# Altium PCB NucciF.PcbDoc (part 3 of 3)
Units mm, origin at the board's own origin, x right, y up, seen from the top; angles counter-clockwise.
Board outline 88.1 x 36.1 mm, 4 copper layers (Top Layer, inner 1, inner 2, Bottom Layer), stack 1.588 mm thick; 144 components, 118 nets, 519 pads, 140 vias.
Unrouted connection lines stored in the file: 6.
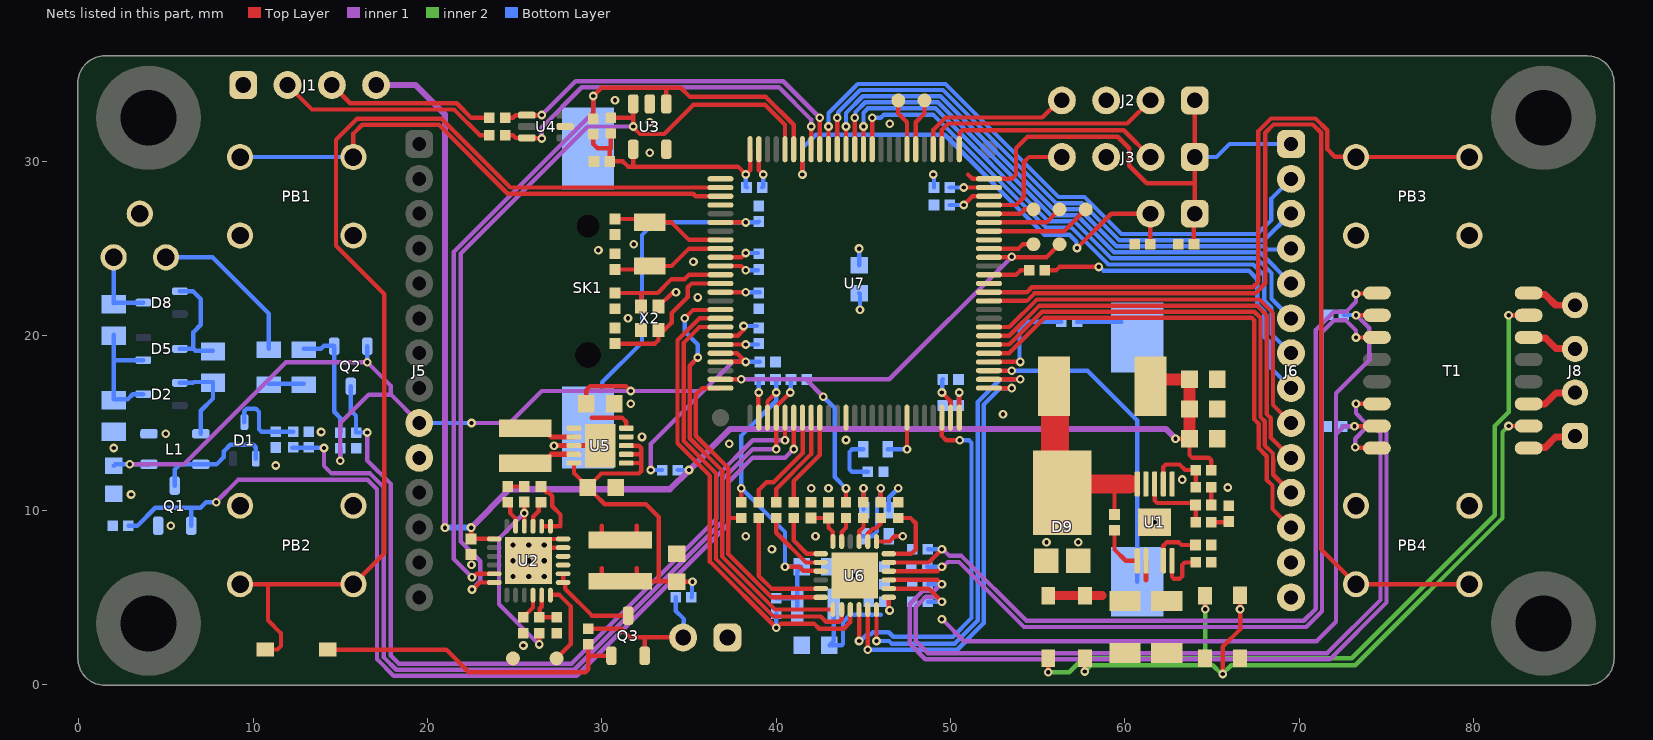
[diagram p4: the nets of this part, all layers, seen from the top]

## Via types
v1: diameter 0.5, hole 0.25, Top Layer to Bottom Layer, tented both sides, 131 vias
v2: diameter 0.6, hole 0.3, Top Layer to Bottom Layer, tented bottom, 9 vias

## Nets (pads, with @x,y where several pads share a name; then routed paths per layer and width w, separated by ;. In a path a pad name is that pad's centre, name@x,y a point inside that pad or via, vN(x,y) a via of type N, cw(c..) or ccw(c..) an arc to the next point about the centre after c; other vN are vias at no path point)
0V: B3.1 C1.1 C2.1 C3.1 C4.1 C5.1 C8.2 C9.1 C10.1 C11.1 C12.1 C13.2 C16.1 C17.1 C18.1 C19.1 C20.2 C21.2 C22.1 C23.2 C24.1 C25.1 C26.1 C27.1 C28.1 C29.2 C30.1 C31.1 C32.1 C33.1 C34.1 C35.2 C36.2 C37.1 C38.1 C39.2 C40.1 C41.1 C42.1 C43.1 C44.1 C45.1 C46.1 C47.1 C48.1 C49.1 D4.2 D7.2 D9.1 D9.2 J1.1 J2.3 J3.3 J5.10 J6.13 J6.14 J7.1 L1.2 LD3.1 PB1.1 PB1.2 PB2.1 PB2.2 PB3.1 PB3.2 PB4.1 PB4.2 Q1.2 R1.1 R4.2 R9.1 R11.1 R12.1 R13.1 R15.2 R18.1 R24.1 R32.2 SK1.2 TP2.1 U1.6 U1.9 U1.11 U2.17 U2.18 U2.25 U3.2 U3.5 U4.2 U5.3 U5.9 U5.11 U6.25 U7.10 U7.20 U7.27 U7.37 U7.74 U7.99 X2.2 X2.4 | length 21.9
  Top Layer w0.25: C11.1@24.605,11.355 C12.1@25.545,11.355 ; U2.17@27.775,7.85 26.85,7.85 v2(26.7,8) 27.044,8.344 27.769,8.344 U2.18@27.775,8.35 ; X2.2@33.25,21.675 34.075,22.5 v1(34.25,22.5) ; U7.20@36.8,19.5 v1(38.25,19.5) ; U7.10@36.8,24.5 38,24.5 v1(38.25,24.75) ; U7.27@39,15.3 38.975,15.325 38.975,16.725 v1(39,16.75) ; U7.99@39,30.7 39,29.5 v1(39.25,29.25) ; v1(50.75,28.5) U7.74@52.2,28.5 ; C18.1@64.95,10.3 R24.1@64.95,11.3
  Top Layer w0.3: v1(27.25,13.7) U5.3@28.4,13.7 U5.11@29.9,13.7
  Bottom Layer w0.25: v1(38.25,19.5) C41.1@38.95,19.5 ; v1(38.25,24.75) C40.1@38.95,24.75 ; v1(39,16.75) C43.1@39,17.45 ; C46.1@39.2,28.5 39.25,28.55 v1(39.25,29.25) ; C39.2@44.75,24.05 v1(44.75,25) ; LD3.1@46.45,10 46.45,10.71 v1@46.995,11.255 ; C45.1@49.95,28.5 v1(50.75,28.5)
  other v1: 25.5,2.234 44.5,6.25 22.525,6.871 39.75,7.75 55.5,8.158 57.32,8.162 38.25,8.5 42.25,8.5 5.273,9.106 61.7,9.3 3,10.9 42,11.25 43,11.25 47,11.25 65.9,11.3 63.276,11.752 11.3,12.561 2,13.562 37.3,13.8 44,14.02 32.3,14.2 4.983,14.375 13.897,14.477 53,15.5 31.65,16.1 31.5,21 35.5,22.2 35.25,24.25 29.8,24.9 31.825,25.25 32.75,30.5 46.504,32.161 32.75,32.25 30.75,33.5
  other v2: 24.9,6.2 25.8,6.2 26.7,6.2 24.9,7.1 25.8,7.1 26.7,7.1 24.9,8 25.8,8
400V: B1.1 C7.2 D8.3 | length 4.4
  Bottom Layer w0.25: B1.1@2,24.5 2,21.85 2.05,21.9 D8.3@3.7,21.9
+3.3V: C2.2 C3.2 C16.2 C24.2 C37.2 C39.1 C40.2 C41.2 C42.2 C43.2 C44.2 C45.2 C46.2 J2.1 J3.1 J4.1 J5.9 J6.1 L1.1 L5.2 Q2.2 R10.2 R25.2 R26.2 R27.2 R28.2 R29.2 U3.4 U5.1 U5.10 U6.9 U7.11 U7.19 U7.21 U7.22 U7.28 U7.50 U7.75 U7.100 | length 142.4
  Top Layer w0.25: C24.2@29.1,16.1 29.1,16.879 29.321,17.1 31.379,17.1 v1@31.649,16.83 ; 29.416,15.29 31.177,15.29 31.395,15.072 31.395,14.705 U5.10@31.4,14.7 ; R27.2@29.5,31.55 29.5,31 29.75,30.75 30.5,30.75 ; R28.2@30.5,31.6 30.5,30.75 ; U3.4@31.8,30.65 31.8,29.75 31.75,29.7 ; U7.22@36.8,18.5 v1(38.25,18.5) 37.75,19 U7.21@36.8,19 ; U7.19@36.8,20 37.795,20 38.127,20.332 v1(38.127,20.557) ; U7.11@36.8,24 38,24 v1(38.25,23.75) ; R26.2@38,10.45 v1(38,11.25) ; U7.100@38.5,30.7 38.5,29.5 v1(38.25,29.25) 37.8,29.7 31.75,29.7 ; U7.28@39.5,15.3 39.5,16.25 v1(40,16.75) ; v1(40.5,6.75) 41.318,6.75 41.543,6.525 42.525,6.525 U6.9@42.55,6.5 ; U7.50@50.5,15.3 v1(50.5,16.75) ; 51,29.25 51.25,29 U7.75@52.2,29 53.5,29 53.75,29.25 53.75,30.75 54.417,31.417 59.583,31.417 60.25,30.75 60.25,29.75 61.25,28.75 64,28.75 ; C2.2@63.95,25.25 63.95,26.95 J4.1@64,27 64,28.75 ; J2.1@64,33.5 J3.1@64,30.25 63.91,30.16 64,30.07 64,28.75 ; 30.5,30.75 30.45,30.7 C16.2@30.45,30 31.2,30 31.5,29.7 31.75,29.7
  inner 1 w0.25: v1(2.917,12.625) 6.025,12.625 11.875,18.475 v1(16.55,18.475) ; v1(15,12.826) 15,15 16.625,16.625 17.9,16.625 ; v1@16.554,18.47 17.9,17.125 17.9,16.625 ; J5.9@19.525,15 17.9,16.625 ; v1(22.525,15) 24.72,15 26.55,16.83 v1(31.65,16.83) 35.83,16.83 ; v1(32.8,12.3) 32.8,13.8 35.83,16.83 ; v1(38.25,18.5) 37.5,18.5 35.83,16.83
  Bottom Layer w0.25: C3.2@2,12.55 2.075,12.625 v1(2.917,12.625) L1.1@4.025,12.625 ; v1(15,12.826) R10.2@15,13.55 ; v1(16.55,18.475) Q2.2@16.55,19.4 ; J5.9@19.525,15 v1(22.525,15) ; v1(32.8,12.3) R29.2@33.45,12.3 ; v1(38.127,20.557) C41.2@38.893,20.557 ; v1(38.25,18.5) C42.2@39.05,18.5 ; v1(38.25,23.75) C40.2@38.95,23.75 ; v1(38.25,29.25) 38.25,28.55 C46.2@38.3,28.5 ; R25.2@40,4.95 L5.2@41,4.95 ; C43.2@40,17.45 v1(40,16.75) 40,16.278 38,14.278 v1(38,11.25) 40.5,8.75 v1(40.5,6.75) C37.2@41.45,6.75 41.2,6.5 L5.2@41.2,4.5 ; C39.1@44.75,22.45 44.8,22.4 v1(44.8,21.5) ; v1(49,29.25) 49.05,29.2 C45.2@49.05,28.5 ; C44.2@50.45,16 50.475,16.025 50.475,16.725 v1(50.5,16.75) ; J3.1@64,30.25 65.25,30.25 66,31 J6.1@69.525,31
ADC12_IN4: C38.2 R7.2 R9.2 U7.29 | length 50.3
  Top Layer w0.25: v1(40,13.5) U7.29@40,15.3 ; U7.29@40.01,15.31 40.01,15.953 v1(40.806,16.75)
  inner 1 w0.25: v1(14.063,13.562) 14.063,12.537 14.495,12.105 16.698,12.105 17.5,11.303 17.5,1.551 18.201,0.85 28.411,0.85 36.9,9.339 36.9,11.75 38.65,13.5 v1(40,13.5)
  Bottom Layer w0.25: R7.2@12.25,13.581 14.043,13.581 v1(14.063,13.562) ; v1(40.806,16.75) 40.828,16.772 40.828,17.478 C38.2@40.85,17.5
B_DOWN: PB4.3 PB4.4 U7.61 | length 61.7
  Top Layer w0.25: U7.61@52.2,22 54.373,22 54.803,22.43 67.471,22.43 68.05,23.009 68.05,31.646 68.518,32.114 70.774,32.114 71.25,31.637 71.25,7.75 PB4.3@73.25,5.75 PB4.4@79.75,5.75
B_MODE: U7.4
B_NEXT: D10.1 PB2.3 PB2.4 U7.2 | length 62.9
  Top Layer w0.25: PB2.3@9.25,5.75 10.85,5.75 ; D10.1@10.689,2 10.699,2.01 11.398,2.01 11.6,2.212 11.6,2.929 10.85,3.679 10.85,5.75 ; U7.2@36.8,28.5 24.75,28.5 20.8,32.45 15.958,32.45 14.748,31.24 14.748,25.16 17.517,22.391 17.517,7.517 PB2.4@15.75,5.75 10.85,5.75
B_ONOFF: U7.1
B_UP: PB3.3 PB3.4 U7.62 | length 38.3
  Top Layer w0.25: U7.62@52.2,22.5 54.378,22.5 54.658,22.78 67.326,22.78 67.65,23.104 67.65,31.74 68.373,32.464 70.919,32.464 71.6,31.782 71.6,30.705 72.033,30.272 73.228,30.272 PB3.4@73.25,30.25 PB3.3@79.75,30.25
B_VIEW: PB1.3 PB1.4 U7.3 | length 30.8
  Top Layer w0.25: PB1.3@15.75,30.25 15.75,31.597 16.253,32.1 20.655,32.1 24.605,28.15 35.236,28.15 35.386,28 U7.3@36.8,28
  Bottom Layer w0.25: PB1.4@9.25,30.25 PB1.3@15.75,30.25
B_ZERO: U7.63
BAT: J7.2 Q3.2 R30.2 R31.2 | length 9.2
  Top Layer w0.25: R31.2@29.225,3.199 31.101,3.199 31.6,2.7 32.45,2.7 ; Q3.2@32.45,1.65 32.45,2.7 ; J7.2@34.66,2.7 32.45,2.7
  Bottom Layer w0.25: R30.2@34.236,5.008 34.236,4.218 34.704,3.75 34.704,2.744 J7.2@34.66,2.7
BOOT0: J4.2 R4.1 U7.94 | length 28.7
  Top Layer w0.25: v1(41.5,29.25) U7.94@41.5,30.7 ; v1(57.245,25.035) 59.21,27 J4.2@61.46,27 61.45,26.99 R4.1@61.45,25.25
  Bottom Layer w0.25: v1(41.5,29.25) 41.5,30.761 42.264,31.525 49.657,31.525 55.386,25.796 56.821,25.796 57.221,25.396 57.221,25.059 v1(57.245,25.035)
BTS: R17.1 R18.2 U2.11 | length 2.3
  Top Layer w0.25: U2.11@26.55,5.125 26.55,4.467 26.441,4.358 26.441,3.891 R17.1@26.4,3.85 R18.2@27.4,3.85
CAN1_RX: TP9.1 U7.81 | length 3
  Top Layer w0.25: U7.81@48,30.7 48,32.25 48.5,32.75 TP9.1@48.5,33.5
CAN1_TX: TP8.1 U7.82 | length 3
  Top Layer w0.25: TP8.1@47,33.5 47,32.75 47.5,32.25 U7.82@47.5,30.7
CON_RX: J1.2 R2.1 | length 12.8
  Top Layer w0.25: J1.2@11.973,34.379 13.372,32.98 21.525,32.98 23.005,31.5 R2.1@23.55,31.5
CON_TX: J1.3 R3.1 | length 9.8
  Top Layer w0.25: J1.3@14.513,34.379 15.562,33.33 21.67,33.33 22.5,32.5 R3.1@23.55,32.5
DTOUT: Q2.3 R11.2 U7.30 | length 47.6
  Top Layer w0.25: v1(40.5,14.003) U7.30@40.5,15.3
  inner 1 w0.25: v1(16.549,14.45) 16.549,12.851 17.9,11.5 17.9,1.646 18.346,1.2 28.266,1.2 36.55,9.484 36.55,11.895 38.658,14.003 v1(40.5,14.003)
  Bottom Layer w0.25: Q2.3@15.6,17.1 15.6,15.716 15.9,15.416 R11.2@15.9,14.45 v1(16.549,14.45)
ETH_CRS_DV: R21.1 U7.32 | length 6.1
  Top Layer w0.25: R21.1@39,10.45 39,11.159 39.445,11.604 39.847,11.604 41.515,13.272 41.515,14.65 41.51,14.656 41.51,15.29 U7.32@41.5,15.3
ETH_MDC: U6.13 U7.16 | length 24.8
  Top Layer w0.25: v1(34.75,21) 35.225,21.475 36.775,21.475 U7.16@36.8,21.5 ; v1(35.5,18.75) 35.036,18.286 35.036,14.124 36.895,12.266 36.895,7.339 39.934,4.3 U6.13@43.25,4.3
  Bottom Layer w0.25: v1(34.75,21) 34.75,20.25 35.5,19.5 v1(35.5,18.75)
ETH_MDIO: R26.1 U6.12 U7.25 | length 18.6
  Top Layer w0.25: U7.25@36.8,17 35.75,17 35.386,16.636 35.386,14.269 37.245,12.411 37.245,9.55 ; R26.1@38,9.55 37.245,9.55 ; U6.12@42.55,5 39.729,5 37.245,7.484 37.245,9.55
ETH_REF_CLK: R22.1 TP4.1 U7.24 U7.66 | length 32
  Top Layer w0.25: U7.24@36.8,17.5 v1(38,17.5) ; R22.1@44,10.45 v1(44,11.247) ; U7.66@52.2,24.5 53.475,24.5 v1(53.5,24.525) ; v1@53.5,24.546 53.548,24.498 55.498,24.498 TP4.1@56.25,25.25
  inner 1 w0.25: v1(38,17.5) 41.7,17.5 ; v1(42.7,16.5) 41.7,17.5 ; v1(53.5,24.525) 46.475,17.5 41.7,17.5
  Bottom Layer w0.25: v1(42.7,16.5) 43.35,15.85 43.35,11.897 v1(44,11.247)
ETH_RXD0: R19.1 U7.33 | length 5.7
  Top Layer w0.25: R19.1@40,10.45 40,11.215 42,13.215 U7.33@42,15.3
ETH_RXD1: R20.1 U7.34 | length 5.5
  Top Layer w0.25: R20.1@41,10.45 41,11.665 42.5,13.165 U7.34@42.5,15.3
ETH_TXD0: U6.17 U7.51 | length 25.4
  Top Layer w0.25: v1(45.25,1.996) U6.17@45.25,4.3 ; U7.51@52.21,16.99 U7.51@52.2,17 v1(53.5,17)
  Bottom Layer w0.25: v1(45.25,1.996) 50.376,1.996 51.9,3.52 51.9,16.059 52.841,17 v1(53.5,17)
ETH_TXD1: U6.18 U7.52 | length 25.5
  Top Layer w0.25: v1@45.75,2.499 U6.18@45.75,4.3 ; U7.52@52.2,17.5 v1(54,17.5)
  Bottom Layer w0.25: v1(45.748,2.496) 46.463,2.496 46.614,2.346 50.231,2.346 51.55,3.665 51.55,16.204 52.846,17.5 v1(54,17.5)
ETH_TXEN: U6.16 U7.48 | length 22
  Top Layer w0.25: v1(44.75,2.496) U6.16@44.75,4.3 ; U7.48@49.5,15.3 49.5,14.25 49.75,14 50.52,14 v1(50.523,14.003)
  Bottom Layer w0.25: v1(44.75,2.496) 44.818,2.496 45.202,2.881 45.426,2.881 45.545,3 46.455,3 46.71,2.744 50.134,2.744 51.2,3.81 51.2,13.856 51.054,14.003 v1(50.523,14.003)
GP_ETH_NINT: U6.14 U7.18 | length 25
  Top Layer w0.25: U7.18@36.8,20.5 35.594,20.5 34.686,19.593 34.686,13.979 36.545,12.121 36.545,7.194 39.839,3.9 42.55,3.9 42.852,3.598 43.604,3.598 43.75,3.745 U6.14@43.75,4.3
GP_ETH_NRST: R25.1 U6.15 U7.17 | length 28
  Top Layer w0.25: U7.17@36.8,21 35.599,21 34.336,19.738 34.336,13.834 36.195,11.976 36.195,7.049 39.994,3.25 40.027,3.25 40.271,3.494 42.168,3.494 42.464,3.198 43.87,3.198 44.25,3.578 U6.15@44.25,4.3
  Bottom Layer w0.25: v1(40,3.25) R25.1@40,4.05
GP_GP0: J6.10 U7.57 | length 25.6
  Top Layer w0.25: U7.57@52.2,20 53.363,20 55.093,21.73 67.564,21.73 68.121,21.173 68.121,15.515 68.369,15.267 68.369,14.156 J6.10@69.525,13
GP_GP1: J6.9 U7.58 | length 24
  Top Layer w0.25: U7.58@52.2,20.5 53.368,20.5 54.948,22.08 67.709,22.08 68.488,21.301 68.488,16.037 J6.9@69.525,15
I2C1_SCL: R27.1 U2.5 U3.1 U7.95 | length 48.9
  Top Layer w0.25: v1(22.55,6.15) 22.618,6.15 22.818,6.35 U2.5@23.825,6.35 ; R27.1@29.5,32.45 v1(29.5,33.752) 29.973,34.225 33.7,34.225 ; U3.1@33.7,33.35 33.7,34.225 ; U7.95@41,30.7 41,32.096 39.396,33.7 35.05,33.7 34.525,34.225 33.7,34.225
  inner 1 w0.25: v1(22.55,6.15) 21.5,7.2 21.5,24.811 29.5,32.811 v1(29.5,33.752)
I2C1_SDA: R28.1 U2.6 U3.3 U7.96 | length 48.7
  Top Layer w0.25: v1(22.55,5.45) 22.618,5.45 23.018,5.85 U2.6@23.825,5.85 23.819,5.844 U2.6@23.526,5.844 ; R28.1@30.5,32.5 31.8,32.5 ; U3.3@31.8,33.35 U3.3@31.8,33.3 31.8,32.5 ; U7.96@40.5,30.7 40.5,32.101 39.351,33.25 35.25,33.25 33.575,31.575 32.185,31.575 31.8,31.96 v1(31.8,32) 31.8,32.5
  inner 1 w0.25: v1(22.55,5.45) 23.025,5.925 23.025,7.075 21.9,8.2 21.9,24.716 29.184,32 v1(31.8,32)
LCD_CS: J6.6 U7.87 | length 32.6
  Top Layer w0.25: U7.87@45,30.7 v1(45,32)
  Bottom Layer w0.25: v1(45,32) 45,32.787 45.255,33.042 49.13,33.042 55.612,26.56 57.1,26.56 59.224,24.436 67.564,24.436 68.399,23.601 68.399,22.126 J6.6@69.525,21
LCD_DC: J6.5 U7.88 | length 31.7
  Top Layer w0.25: U7.88@44.5,30.7 v1(44.5,32.5)
  Bottom Layer w0.25: v1(44.5,32.5) 44.548,32.548 44.548,32.83 45.11,33.392 49.275,33.392 55.757,26.91 57.245,26.91 59.369,24.786 67.739,24.786 J6.5@69.525,23
LCD_LED_PWM: J6.8 R8.1 | length 19.6
  Top Layer w0.25: R8.1@55.4,23.75 56.046,23.75 56.246,23.95 v1(58.5,23.95)
  Bottom Layer w0.25: v1(58.5,23.95) 58.558,23.95 58.771,23.736 67.097,23.736 67.586,23.247 67.586,21.793 67.986,21.393 67.986,19.95 68.397,19.54 68.397,18.128 J6.8@69.525,17
LCD_RST: J6.7 U7.86 | length 33.3
  Top Layer w0.25: U7.86@45.5,30.7 v1(45.5,32.5)
  Bottom Layer w0.25: v1(45.5,32.5) 45.988,32.5 46.172,32.684 48.994,32.684 55.467,26.21 56.927,26.21 59.05,24.086 67.357,24.086 67.986,23.457 67.986,22.021 68.399,21.608 68.399,20.101 69.5,19 J6.7@69.525,19
LED_ACT: R37.1 U6.3 | length 1.5
  Top Layer w0.25: U6.3@44.75,8.2 44.75,8.783 45,9.033 R37.1@45,9.55
LED_GP: LD1.2 U7.44 | length 2.9
  Top Layer w0.25: v1(47.5,13.495) U7.44@47.5,15.3
  Bottom Layer w0.25: LD1.2@46.4,13.5 46.405,13.495 v1(47.5,13.495)
LED_SPEED: R38.1 U6.2 | length 1.7
  Top Layer w0.25: U6.2@45.25,8.2 45.25,8.647 45.553,8.95 45.7,8.95 46,9.25 R38.1@46,9.55
NetC4_2: C4.2 D1.3 R7.1 | length 4.6
  Bottom Layer w0.25: D1.3@9.5,15.05 9.495,15.055 9.495,15.675 9.642,15.822 10.143,15.822 10.333,15.633 10.333,14.646 10.479,14.5 C4.2@11.3,14.5 R7.1@12.3,14.5
NetC5_2: C5.2 C7.1 D2.3 D5.1 | length 7.1
  Bottom Layer w0.25: C5.2@2,16.35 2.8,16.35 3.1,16.65 D2.3@3.7,16.65 ; C5.2@2,16.45 2,18.6 ; C7.1@2,20.05 C7.1@2,20 2,18.6 ; D5.1@3.7,18.6 2,18.6
NetC6_1: C6.1 D2.1 L1.3 | length 5.2
  Bottom Layer w0.25: D2.1@5.8,17.3 6.55,17.3 6.6,17.35 7.7,17.35 7.7,16.401 7,15.701 L1.3@7,14.375
NetC6_2: C6.2 D5.3 D8.1 | length 6.4
  Bottom Layer w0.25: D5.3@5.8,19.25 6.575,19.25 ; D8.1@5.8,22.55 6.552,22.55 7,22.102 7,20.625 6.575,20.2 6.575,19.25 ; C6.2@7.7,19.15 6.675,19.15 6.575,19.25
NetC9_2: C9.2 U1.4 | length 2.9
  Top Layer w0.25: U1.4@62.2,7.1 62.2,7.964 62.386,8.15 63.087,8.15 63.237,8 C9.2@64.05,8
NetC11_2: C11.2 U2.23 | length 1.5
  Top Layer w0.25: C11.2@24.6,10.35 24.736,10.214 24.736,9.835 25.044,9.527 25.044,9.081 U2.23@25.05,9.075
NetC14_1: C14.1 U1.1 | length 2.7
  Top Layer w0.25: C14.1@59.4,8.85 59.4,7.743 60.043,7.1 U1.1@60.7,7.1
NetC14_2: C14.2 D9.3 L2.1 U1.10 | length 8.2
  Top Layer w0.25: C14.2@59.4,9.75 59.4,11.5
  Top Layer w1.1: D9.3@57.978,11.5 59.4,11.5 60.25,11.5
  Top Layer w1.6: L2.1@55.98,16.3 55.99,16.29 55.99,12.131 D9.3@56,12.121
NetC15_1: C15.1 U2.21 | length 1.6
  Top Layer w0.25: U2.21@26.05,9.075 26.056,9.081 26.056,9.616 26.37,9.93 26.37,10.32 C15.1@26.5,10.45
NetC15_2: C15.2 L3.1 U2.19 U2.20 | length 4.6
  Top Layer w0.25: U2.20@26.55,9.075 U2.19@27.05,9.075 27.465,9.075 ; C15.2@26.55,11.3 26.815,11.035 26.924,11.035 27.156,10.803 27.156,10.217 27.628,9.745 27.628,9.075 ; L3.1@30,8.6 30,9.095 ; L3.1@32,8.6 32,9.095
NetC17_2: C17.2 R16.1 | length 1
  Top Layer w0.25: R16.1@64.95,9.3 65.9,9.3 C17.2@65.95,9.35
NetC18_2: C18.2 R16.2 U1.8 | length 4.3
  Top Layer w0.25: U1.8@61.7,11.5 61.7,10.556 61.846,10.41 63.89,10.41 C18.2@64,10.3 ; R16.2@64.05,9.3 C18.2@64.05,10.3
NetC25_2: C25.2 C26.2 U6.6 | length 2.5
  Top Layer w0.25: C25.2@42,9.55 C26.2@43,9.55 43,9 43.25,8.75 U6.6@43.25,8.2
NetD1_1: D1.1 L1.4 Q1.3 | length 7.1
  Bottom Layer w0.25: Q1.3@5.5,11.406 5.5,12.328 5.797,12.625 L1.4@7,12.625 7.893,12.625 8.31,13.042 8.31,13.37 8.69,13.75 10.004,13.75 10.15,13.604 D1.1@10.15,12.95
NetL4_1: L4.1 U5.4 | length 2
  Top Layer w0.3: L4.1@26.6,12.7 27.1,13.2 U5.4@28.4,13.2
NetL4_2: L4.2 U5.2 | length 2
  Top Layer w0.3: L4.2@26.6,14.7 27.1,14.2 U5.2@28.4,14.2
NetLD1_1: LD1.1 R15.1 | length 3
  Bottom Layer w0.25: 44.426,13.495 44.358,13.495 44.2,13.337 44.2,12.346 44.346,12.2 R15.1@45.25,12.2 ; 44.426,13.5 LD1.1@45,13.5
NetLD2_1: LD2.1 R38.2 | length 4.3
  Top Layer w0.25: R38.2@46,10.45 v1(46,11.25)
  Bottom Layer w0.25: LD2.1@44.95,8.5 LD2.1@45.05,8.5 45.5,8.5 45.775,8.775 45.775,10.61 46,10.835 v1(46,11.25)
NetLD3_2: LD3.2 R37.2 | length 2
  Top Layer w0.25: R37.2@45,10.45 v1(45,11.25)
  Bottom Layer w0.25: LD3.2@45,10.05 v1(45,11.25)
NetLS1_2: LS1.2 R14.1 | length 2.6
  Bottom Layer w0.25: R14.1@57.25,20.8 LS1.2@59.8,20.8
NetQ2_1: Q2.1 R6.2 R10.1 | length 6.9
  Bottom Layer w0.25: R6.2@12.9,19.25 13.888,19.25 14.063,19.425 14.625,19.425 Q2.1@14.65,19.4 14.65,15.637 15,15.287 R10.1@15,14.45
NetR5_2: R5.2 R6.1 | length 2
  Bottom Layer w0.25: R5.2@10.9,17.25 R6.1@12.9,17.25
NetR12_2: R12.2 U2.10 | length 1.5
  Top Layer w0.25: R12.2@25.5,3.85 25.675,4.025 25.675,4.043 26.05,4.418 U2.10@26.05,5.125
NetR13_2: R13.2 U1.5 | length 3.1
  Top Layer w0.25: U1.5@62.7,7.1 62.7,6.17 62.811,6.058 63.13,6.058 63.276,6.205 63.276,6.854 63.423,7 R13.2@64.05,7
NetR19_2: R19.2 U6.8 | length 4.1
  Top Layer w0.25: R19.2@40,9.55 40,8.705 41.705,7 U6.8@42.55,7
NetR20_2: R20.2 U6.7 | length 3.2
  Top Layer w0.25: R20.2@41,9.55 41,8.255 41.755,7.5 U6.7@42.55,7.5
NetR21_2: R21.2 U6.11 | length 7.2
  Top Layer w0.25: R21.2@39,9.55 39,6.23 39.73,5.5 U6.11@42.55,5.5
NetR22_2: R22.2 U6.5 | length 1.5
  Top Layer w0.25: U6.5@43.775,8.225 U6.5@43.75,8.2 43.75,8.75 44,9 R22.2@44,9.55
NetR23_1: R23.1 R24.2 U1.7 | length 4
  Top Layer w0.25: U1.7@62.2,11.5 62.2,12.475 62.346,12.621 63.129,12.621 63.45,12.3 R23.1@64,12.3 ; R24.2@64.05,11.3 R23.1@64.05,12.3
NetR32_1: R32.1 U6.24 | length 4.3
  Top Layer w0.25: U6.24@46.45,7.5 47.75,7.5 48,7.75 48,9.25 47.7,9.55 R32.1@47,9.55
NetTP1_1: TP1.1 U2.12 | length 4.8
  Top Layer w0.25: U2.12@27.05,5.125 27.063,5.138 27.573,5.138 28.206,4.505 28.206,2.306 TP1.1@27.4,1.5
NRST: C49.2 U7.14 | length 2.3
  Top Layer w0.25: U7.14@36.8,22.5 v1(38.25,22.5)
  Bottom Layer w0.25: v1(38.25,22.5) C49.2@39.05,22.5
OSC32_IN: C27.2 U7.8 X1.2 | length 6.3
  Top Layer w0.25: C27.2@30.75,26.7 X1.2@32.55,26.7 ; X1.2@32.75,26.5 34,26.5 35,25.5 U7.8@36.8,25.5
OSC32_OUT: C28.2 U7.9 X1.1 | length 6.3
  Top Layer w0.25: C28.2@30.75,23.8 X1.1@32.55,23.8 ; X1.1@32.75,24 34,24 35,25 U7.9@36.8,25
OSC_IN: C30.2 U7.12 X2.3 | length 7.3
  Top Layer w0.25: C30.2@30.75,22.45 32.25,22.45 ; X2.3@32.25,21.675 32.25,22.45 ; U7.12@36.8,23.5 35,23.5 34.75,23.25 34,23.25 33.2,22.45 32.25,22.45
OSC_OUT: C31.2 U7.13 X2.1 | length 8.5
  Top Layer w0.25: C31.2@30.75,19.55 33.05,19.55 33.25,19.75 X2.1@33.25,20.325 33.575,20.325 34,20.75 34,21.295 34.925,22.22 34.925,22.78 35.145,23 U7.13@36.8,23
PE1: D3.2 D4.1 T1.15 | length 46.8
  Top Layer w0.25: v1(55.6,0.7) D3.2@55.6,1.5 ; v1(64.6,4.322) D4.1@64.6,5.1 ; v1(82,21.175) T1.15@83.15,21.175
  inner 2 w0.25: v1(55.6,0.7) 56.8,0.7 57.6,1.5 65,1.5 ; v1(64.6,4.322) 64.6,1.9 65,1.5 ; v1(82,21.175) 82,15.615 81.21,14.825 81.21,9.71 73,1.5 65,1.5
PE2: D6.2 D7.1 T1.10 | length 40.2
  Top Layer w0.25: v1(57.7,0.742) D6.2@57.7,1.5 ; v1(65.6,0.6) 65.6,2.161 66.6,3.161 v1(66.6,4.322) D7.1@66.6,5.118 ; v1(82,14.825) T1.10@83.15,14.825
  inner 2 w0.25: v1(57.7,0.742) 58.058,1.1 65.032,1.1 v1@65.532,0.6 ; v1(65.6,0.6) 66.1,1.1 73.207,1.1 81.65,9.543 81.65,14.475 v1(82,14.825)
POWER_ON: D10.2 Q3.1 R31.1 | length 18.1
  Top Layer w0.25: D10.2@14.289,2 21.075,2 22.369,0.705 29.063,0.705 29.225,0.868 R31.1@29.225,2.299 ; 29.371,1.65 Q3.1@30.55,1.65
PULSE: B2.1 R5.1 | length 9.3
  Bottom Layer w0.25: B2.1@5,24.5 7.671,24.5 10.9,21.271 R5.1@10.9,19.25
RCC_MCO1: TP3.1 U7.67 | length 2.7
  Top Layer w0.25: U7.67@52.2,25 53.895,25 54.145,25.25 TP3.1@54.75,25.25
RD_N: R33.1 T1.3 U6.22 | length 48
  Top Layer w0.25: U6.22@46.45,6.5 49.25,6.5 v1(49.5,6.75) ; v1(73.25,19.9) 73.252,19.903 74.448,19.903 T1.3@74.45,19.905
  Top Layer w0.254: v1(49.5,6.75) v1@49.585,6.665
  inner 1 w0.25: v1(49.5,6.75) 49.568,6.75 49.843,7.025 50.48,7.025 54.205,3.3 70.4,3.3 71.3,4.2 71.3,20.205 71.995,20.9 72.654,20.9 73.25,20.304 v1(73.25,19.9)
  Bottom Layer w0.25: R33.1@48.65,6.75 v1(49.5,6.75)
RD_P: R34.1 T1.1 U6.23 | length 48.2
  Top Layer w0.25: U6.23@46.45,7 48.75,7 49.133,7.383 ; v1(73.25,22.4) 73.272,22.423 74.428,22.423 T1.1@74.45,22.445
  Top Layer w0.254: 49.133,7.383 v1(49.5,7.75)
  inner 1 w0.25: v1(49.5,7.75) 49.568,7.75 49.943,7.375 50.625,7.375 54.35,3.65 70.255,3.65 70.95,4.345 70.95,20.35 71.971,21.371 72.671,21.371 73.25,21.95 v1(73.25,22.4)
  Bottom Layer w0.25: R34.1@48.7,7.75 v1(49.5,7.75)
REGN: C12.2 R17.2 U2.22 | length 11.1
  Top Layer w0.25: U2.22@25.55,9.075 v1(25.55,9.83) C12.2@25.55,10.46 ; v1(26.4,2.3) R17.2@26.4,2.95
  inner 1 w0.25: v1(25.55,9.83) 24.1,8.38 24.1,4.6 v1(26.4,2.3)
RX_N: J8.3 T1.14 | length 2.9
  Top Layer w0.4: T1.14@83.177,19.878 84.127,19.878 84.73,19.275 85.789,19.275 J8.3@85.814,19.25
RX_P: J8.4 T1.16 | length 2.9
  Top Layer w0.4: T1.16@83.217,22.378 84.076,22.378 84.704,21.75 J8.4@85.814,21.75
SBAT: Q3.3 U2.13 U2.14 | length 5.2
  Top Layer w0.25: U2.14@27.775,6.35 U2.13@27.775,5.85 27.881,5.85 27.895,5.836 27.895,5.481 29.426,3.95 Q3.3@31.5,3.95
SPI3_CLK: J6.4 U7.89 | length 31.1
  Top Layer w0.25: U7.89@44,30.7 v1(44,32)
  Bottom Layer w0.25: v1(44,32) 44,32.777 44.965,33.742 49.42,33.742 55.902,27.26 57.39,27.26 59.514,25.136 67.969,25.136 68.156,24.95 68.901,24.95 68.951,25 J6.4@69,25
SPI3_MISO: J6.3 U7.90 | length 32.8
  Top Layer w0.25: U7.90@43.5,30.7 v1(43.5,32.5)
  Bottom Layer w0.25: v1(43.5,32.5) 43.548,32.548 43.548,32.82 44.82,34.092 49.565,34.092 56.047,27.61 57.535,27.61 59.659,25.486 67.986,25.486 J6.3@69.5,27
SPI3_MOSI: J6.2 U7.91 | length 34.9
  Top Layer w0.25: U7.91@43,30.7 v1(43,32)
  Bottom Layer w0.25: v1(43,32) 43,32.767 44.675,34.442 49.71,34.442 56.192,27.96 57.68,27.96 59.804,25.836 67.586,25.836 68.397,26.647 68.397,27.872 J6.2@69.525,29
SWCLK: J3.2 U7.76 | length 12.6
  Top Layer w0.25: U7.76@50.5,30.7 50.51,30.71 50.51,31.634 50.656,31.781 59.929,31.781 J3.2@61.46,30.25
SWDIO: J3.4 U7.72 | length 6.5
  Top Layer w0.25: U7.72@52.2,27.5 53.75,27.5 54.2,27.95 54.2,29.95 54.5,30.25 J3.4@56.38,30.25
TD_N: R35.1 T1.8 U6.20 | length 49.3
  Top Layer w0.25: U6.20@46.45,5.5 48.75,5.5 v1(49.5,4.75) ; v1(73.2,13.6) 73.223,13.578 74.427,13.578 T1.8@74.45,13.555
  inner 1 w0.25: v1(49.5,4.75) 49.432,4.75 49.157,5.025 48.566,5.025 48,4.459 48,2.491 48.691,1.8 71.605,1.8 74.65,4.845 74.65,14.4 74.4,14.65 73.75,14.65 73.2,14.1 v1(73.2,13.6)
  Bottom Layer w0.25: R35.1@48.7,4.75 v1(49.5,4.75)
TD_P: R36.1 T1.6 U6.21 | length 51.5
  Top Layer w0.25: U6.21@46.45,6 49.25,6 v1(49.5,5.75) ; v1(73.25,16.1) 73.252,16.098 74.447,16.098 T1.6@74.45,16.095
  Top Layer w0.254: v1(49.5,5.75) v1@49.584,5.834
  inner 1 w0.25: v1(49.5,5.75) 49.432,5.75 49.057,5.375 48.421,5.375 47.65,4.604 47.65,2.346 48.546,1.45 71.75,1.45 75,4.7 75,14.545 74.545,15 73.8,15 73.25,15.55 v1(73.25,16.1)
  Bottom Layer w0.25: R36.1@48.7,5.75 v1(49.5,5.75)
TIM3_CH1: Q1.1 R1.2 U7.31 | length 59.2
  Top Layer w0.25: v1(41,13.5) U7.31@41,15.3
  inner 1 w0.25: v1@7.886,10.486 9.133,11.733 16.567,11.733 17.1,11.2 17.1,1.457 18.057,0.5 28.556,0.5 37.25,9.194 37.25,11.605 38.645,13 40.5,13 v1(41,13.5)
  Bottom Layer w0.25: R1.2@2.85,9.1 2.857,9.107 3.363,9.107 4.389,10.134 6.45,10.134 ; Q1.1@6.45,9.106 6.45,10.134 ; v1(7.886,10.45) 7.295,10.45 6.978,10.134 6.45,10.134
TIM8_CH2: R8.2 U7.64 | length 2.4
  Top Layer w0.25: U7.64@52.2,23.5 53.75,23.5 54,23.75 R8.2@54.5,23.75
TIM12_CH1: LS1.1 U7.53 | length 18.9
  Top Layer w0.25: U7.53@52.2,18 v1(53.5,18)
  Bottom Layer w0.25: v1(53.5,18) 57.846,18 60.7,15.146 LS1.1@60.7,5.9
TIM12_CH2: R14.2 U7.54 | length 6.3
  Top Layer w0.25: U7.54@52.2,18.5 v1(54,18.5)
  Bottom Layer w0.25: v1(54,18.5) 53.954,18.546 53.954,20.423 54.332,20.8 R14.2@56.35,20.8
TX_N: J8.1 T1.9 | length 2.9
  Top Layer w0.4: T1.9@83.199,13.604 84.104,13.604 84.698,14.198 85.762,14.198 J8.1@85.814,14.25
TX_P: J8.2 T1.11 | length 2.9
  Top Layer w0.4: T1.11@83.15,16.095 84.095,16.095 84.727,16.727 85.791,16.727 J8.2@85.814,16.75
UART1_RX: R2.2 U4.6 U7.93 | length 21.7
  Top Layer w0.25: R2.2@24.45,31.5 24.9,31.5 25.054,31.346 25.696,31.346 25.708,31.333 26.533,31.333 v1(26.55,31.316) ; U7.93@42,30.7 v1(42,32)
  inner 1 w0.25: v1(26.55,31.316) 26.55,31.95 28.85,34.25 40.15,34.25 42,32.4 v1(42,32)
UART1_TX: R3.2 U4.4 U7.92 | length 21.6
  Top Layer w0.25: R3.2@24.45,32.5 24.9,32.5 25.05,32.65 U4.4@25.7,32.65 25.704,32.654 26.546,32.654 v1(26.55,32.658) ; U7.92@42.5,30.7 v1(42.5,32.5)
  inner 1 w0.25: v1(26.55,32.658) 28.492,34.6 40.4,34.6 v1(42.5,32.5)
UART3_RX: J6.11 U7.56 | length 27.2
  Top Layer w0.25: U7.56@52.2,19.5 53.358,19.5 55.238,21.38 67.419,21.38 67.771,21.028 67.771,15.345 68.019,15.097 68.019,13.715 68.486,13.247 68.486,12.929 68.5,12.915 68.5,12.025 J6.11@69.525,11
UART3_TX: J6.12 U7.55 | length 28.9
  Top Layer w0.25: U7.55@52.2,19 53.353,19 55.383,21.03 67.274,21.03 67.421,20.883 67.421,15.2 67.669,14.952 67.669,13.559 68.136,13.092 68.136,11.73 68.458,11.408 68.458,10.067 J6.12@69.525,9
UART4_RX: J2.4 U7.79 | length 9.2
  Top Layer w0.25: U7.79@49,30.7 49,31.806 49.715,32.521 55.26,32.521 56.238,33.5 J2.4@56.38,33.5
UART4_TX: J2.2 U7.78 | length 13.8
  Top Layer w0.25: U7.78@49.5,30.7 49.5,31.811 49.859,32.17 60.13,32.17 J2.2@61.46,33.5
USB_OTG_FS_DM: TP6.1 U7.70 | length 4.4
  Top Layer w0.25: U7.70@52.2,26.5 55.5,26.5 TP6.1@56.25,27.25
USB_OTG_FS_DP: TP5.1 U7.71 | length 2.7
  Top Layer w0.25: U7.71@52.2,27 54,27 54.25,27.25 TP5.1@54.75,27.25
USB_OTG_FS_ID: TP7.1 U7.69 | length 6.1
  Top Layer w0.25: U7.69@52.2,26 56.5,26 TP7.1@57.75,27.25
USB_OTG_FS_VBUS: U7.68
VBAT: C1.2 SK1.1 U7.6 | length 18.4
  Top Layer w0.25: U7.6@36.8,26.5 v1(38.25,26.5)
  Bottom Layer w0.25: SK1.1@30.012,16.804 30.012,17.329 32.3,19.617 32.3,25.782 33.018,26.5 v1(38.25,26.5) 38.95,26.5 C1.2@39,26.55
VCAP1: C47.2 U7.49 | length 2.4
  Top Layer w0.25: v1(49.5,16.75) 50,16.25 U7.49@50,15.3
  Bottom Layer w0.25: v1(49.5,16.75) 49.525,16.775 49.525,17.475 C47.2@49.55,17.5
VCAP2: C48.2 U7.73 | length 2.5
  Top Layer w0.25: v1(50.75,27.5) 51.25,28 U7.73@52.2,28
  Bottom Layer w0.25: C48.2@49.95,27.5 v1(50.75,27.5)
VCH: C10.2 C20.1 C21.1 C23.1 J1.4 L2.2 R23.2 R29.1 U2.1 | length 84.2
  Top Layer w0.25: C10.2@22.5,8.35 v1(22.5,9) ; C10.2@22.6,8.35 U2.1@23.825,8.35 ; v1(62.9,14.1) C23.1@63.7,14.1 63.7,13.165 63.851,13.014 64.804,13.014 64.95,12.868 R23.2@64.95,12.3
  Top Layer w0.7: L2.2@61.97,17.5 C21.1@63.7,17.5 C20.1@63.7,15.8 C23.1@63.7,14.1
  inner 1 w0.35: J1.4@17.053,34.379 19.321,34.379 21,32.7 v1(21,9) ; v1(22.5,9) 24.7,11.2 33.9,11.2 v1(35,12.3) 37.364,14.664 62.336,14.664 v1(62.9,14.1)
  Bottom Layer w0.25: R29.1@34.35,12.3 v1(35,12.3)
  Bottom Layer w0.35: v1(21,9) v1(22.5,9)
VDD_LAN: C29.1 C32.2 C33.2 C34.2 C35.1 C36.1 L5.1 LD2.2 R33.2 R34.2 R35.2 R36.2 T1.2 T1.7 U6.1 U6.19 | length 56.6
  Top Layer w0.25: U6.1@45.75,8.2 46.5,8.2 46.8,8.5 v1(47.25,8.5) ; U6.19@46.45,5 46.45,4.3 v1(46.5,4.25) ; v1(73.163,14.805) 73.173,14.815 74.44,14.815 T1.7@74.45,14.825 ; v1(73.251,21.179) 73.253,21.177 74.448,21.177 T1.2@74.45,21.175
  inner 1 w0.25: v1(49.5,3.75) 50.759,2.491 70.991,2.491 72.1,3.6 72.1,14.35 ; v1(73.163,14.805) 72.555,14.805 72.1,14.35 ; v1(73.251,21.179) 73.274,21.179 74,20.454 74,18.6 72.1,16.7 72.1,14.35
  Bottom Layer w0.25: L5.1@43.3,4.5 43.3,2.5 C34.2@43.05,2.25 43.75,2.25 43.825,2.325 43.825,3.575 44.25,4 46,4 ; C36.1@72.452,14.798 C36.1@72.45,14.8 72.452,14.802 73.161,14.802 v1(73.163,14.805) ; C35.1@72.55,21.2 72.56,21.19 73.241,21.19 v1(73.251,21.179)
VPOE: C8.1 C13.1 D3.1 D6.1 U1.2 | length 4.2
  Top Layer w0.3: U1.2@61.2,7.1 61.2,6.013 61.206,6.006
  Top Layer w0.5: D3.1@55.6,5.1 D6.1@57.7,5.1 58.7,5.1
VSYS: C19.2 C22.2 L3.2 R30.1 U2.15 U2.16 U5.5 U5.6 U5.7 U5.8 | length 23.8
  Top Layer w0.25: U5.5@28.4,12.7 28.4,12.125 29.2,11.325 29.973,12.098 32.115,12.098 32.256,12.239 32.256,12.7 ; C22.2@29.2,11.275 29.55,10.925 29.575,10.925 30.167,10.333 32.528,10.333 33.258,9.603 33.258,5.919 ; L3.2@30,6.187 30,6.682 ; L3.2@31.05,5.919 33.258,5.919 ; U5.6@31.4,12.7 32.256,12.7 ; U5.7@31.4,13.2 32.181,13.2 32.256,13.125 ; U5.8@31.4,13.7 32.109,13.7 32.256,13.554 32.256,13.125 ; L3.2@32,6.187 32,6.682 ; C19.2@34.3,5.9 v1(35.2,5.9) ; C19.2@34.451,5.95 34.42,5.919 33.258,5.919 ; 32.256,12.7 32.256,13.125
  Bottom Layer w0.25: R30.1@35.136,5.008 35.168,5.039 35.168,5.868 v1(35.2,5.9)
pads on no net: D1.2 D2.2 D5.2 D8.2 J5.1 J5.2 J5.3 J5.4 J5.5 J5.6 J5.7 J5.8 J5.11 J5.12 J5.13 J5.14 SK1.MH1 SK1.MH2 T1.4 T1.5 T1.12 T1.13 U1.3 U2.2 U2.3 U2.4 U2.7 U2.8 U2.9 U2.24 U4.1 U4.3 U4.5 U6.4 U6.10 U7.5 U7.7 U7.15 U7.23 U7.26 U7.35 U7.36 U7.38 U7.39 U7.40 U7.41 U7.42 U7.43 U7.45 U7.46 U7.47 U7.59 U7.60 U7.65 U7.77 U7.80 U7.83 U7.84 U7.85 U7.97 U7.98 U7.FTG1 U7.FTG2

## Polygon pours and split planes (outlines as drawn)
0V on Top Layer "0V_L01_P025" (solid, pour order 25): 0,1.5 0,34.5 cw(c1.5,34.5) 1.5,36 86.25,36 cw(c86.25,34.5) 87.75,34.5 87.75,1.5 cw(c86.25,1.5) 86.25,0 1.5,0 cw(c1.5,1.5)
+3.3V on Top Layer "+3.3V_L01_P024" (solid, pour order 24): 38,29.5 38,16.5 51,16.5 51,29.5
VPOE on Top Layer "VPOE_L-01_P-001" (solid, pour order 18): 62.3,6.1 62.6,5.8 63.4,5.8 63.4,3.8 58.7,3.8 58.7,6.1
VSYS on Top Layer "VSYS_L01_P020" (solid, pour order 20): 29.2,6.604 29.2,6.038 32.9,6.038 32.9,7.567 27.315,7.567 27.315,6.604
NetC15_2 on Top Layer "NetC17_2" (solid, pour order 22): 32.9,8.646 32.9,9.608 26.4,9.608 26.4,8.646
+3.3V on Top Layer "+3.3V_L-01_P-001" (solid, pour order 23): 28.833,14.539 28.833,15.072 29.6,15.072 29.6,16.6 27.9,16.6 27.9,14.539
no net on Top Overlay "NONET_L01_P-001" (solid, pour order 12): 20,1.5 20,3.123 21.623,1.5
0V on Bottom Layer "0V_L04_P021" (solid, pour order 21): 0,1.5 0,34.5 cw(c1.5,34.5) 1.5,36 86.25,36 cw(c86.25,34.5) 87.75,34.5 87.75,1.5 cw(c86.25,1.5) 86.25,0 1.5,0 cw(c1.5,1.5)
VDD_LAN on Bottom Layer "VDD_LAN_L04_P019" (solid, pour order 19): 46,10.75 46,8 46,4.75 46,3 49.5,3 50,3.5 50,8.25 47.5,10.75
0V on inner 2 "0V_L04_P028" (solid, pour order 28): -0.05,1.499 cw(c0.198,1.5) -0.05,1.5 -0.05,34.499 cw(c0.001,34.5) -0.05,34.5 cw(c1.501,34.5) -0.05,34.503 -0.05,34.6 cw(c0,34.6) -0.046,34.621 cw(c1.5,34.5) 1.5,36.05 cw(c1.5,36.022) 1.501,36.05 86.5,36.05 cw(c86.5,34.5) 88.05,34.501 cw(c88.003,34.5) 88.05,34.5 88.05,1.5 cw(c88.037,1.5) 88.05,1.499 ccw(c87.663,1.5) 88.05,1.5 88.05,1.499 cw(c86.5,1.5) 86.5,-0.05 1.5,-0.05 cw(c1.5,1.5)

## Keep-outs
Keep-Out Layer:
  lines w0.1: 0,34.5 cw(c1.5,34.5) 1.5,36 86.5,36 cw(c86.5,34.5) 88,34.5 88,1.5 cw(c86.5,1.5) 86.5,0 1.5,0 cw(c1.5,1.5) 0,1.5 0,34.6 ; 77.6,13 ccw(c78.6,13) 79.6,13 79.6,23 ccw(c78.6,23) 77.6,23 77.6,13

## Other copper
Top Layer:
  pour cut-out: 86.95,24.75 79.45,24.75 78.7,24 78.7,12 79.45,11.25 86.95,11.25 87.7,12 87.7,24
Bottom Layer:
  pour cut-out: 86.95,24.75 79.45,24.75 78.7,24 78.7,12 79.45,11.25 86.95,11.25 87.7,12 87.7,24

## Silkscreen, mask and mechanical layers (free items; w line width, h text height)
Top Overlay:
  drawing of 5 lines, arcs and shapes, not listed
  text "RX" at 55.75,34.675 h0.8
  text "GND" at 57.75,34.675 h0.8
  text "TX" at 60.75,34.675 h0.8
  text "3.3" at 63,34.675 h0.8
  text "DIO" at 55.25,31.425 h0.8
  text "GND" at 57.75,31.425 h0.8
  text "CLK" at 60.5,31.425 h0.8
  text "3.3" at 63,31.425 h0.8
  text "BOOT0" at 58.5,28.25 h0.8
  text "3.3" at 63,28.175 h0.8
  text "NucciF V0.1" at 2.5,13.7 h1.2
Bottom Overlay:
  lines w0.15: 47,1.25 47.25,1.25 47.25,6.75 47,6.75 ; 47,2.5 47.25,2.5 ; 47,3.75 47.25,3.75 ; 47,4.75 47.25,4.75 ; 47,5.75 47.25,5.75
  text "Ethernet" at 75.9,14.5 h1 r270
  text "CONNECT" at 44,13 h1
  text "LINK" at 44,9.5 h1
  text "SPEED" at 44,8 h1
Top Solder:
  region: 79.45,11.25 86.95,11.25 87.7,12 87.7,24 86.95,24.75 79.45,24.75 78.7,24 78.7,12
Bottom Solder:
  region: 86.95,24.75 79.45,24.75 78.7,24 78.7,12 79.45,11.25 86.95,11.25 87.7,12 87.7,24

## Dimensions
4,32.5 to 84,32.5 on Mechanical 14
1.5,0 to 1.5,36 on Mechanical 14
84,3.5 to 84,32.5 on Mechanical 14
0,1.5 to 88,1.5 on Mechanical 14